# Allegro board RPI_NRF24L01MODULE_FT232.brd
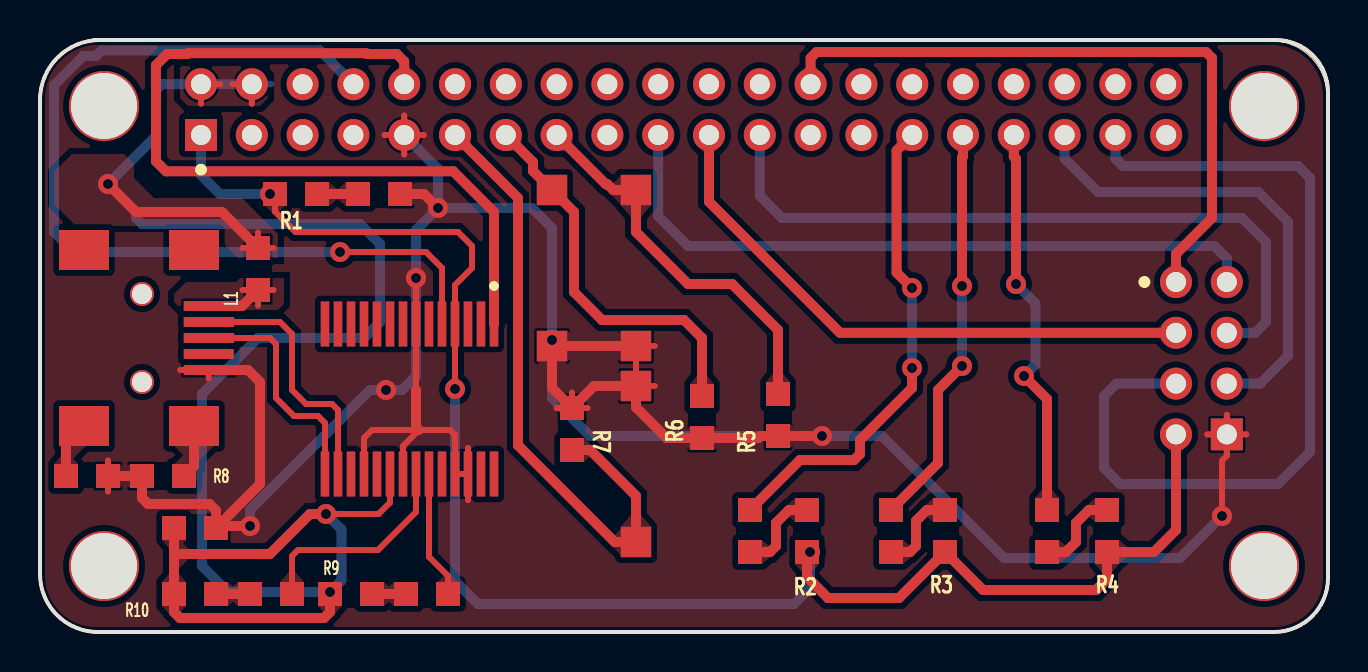
[diagram p0: board, top side]
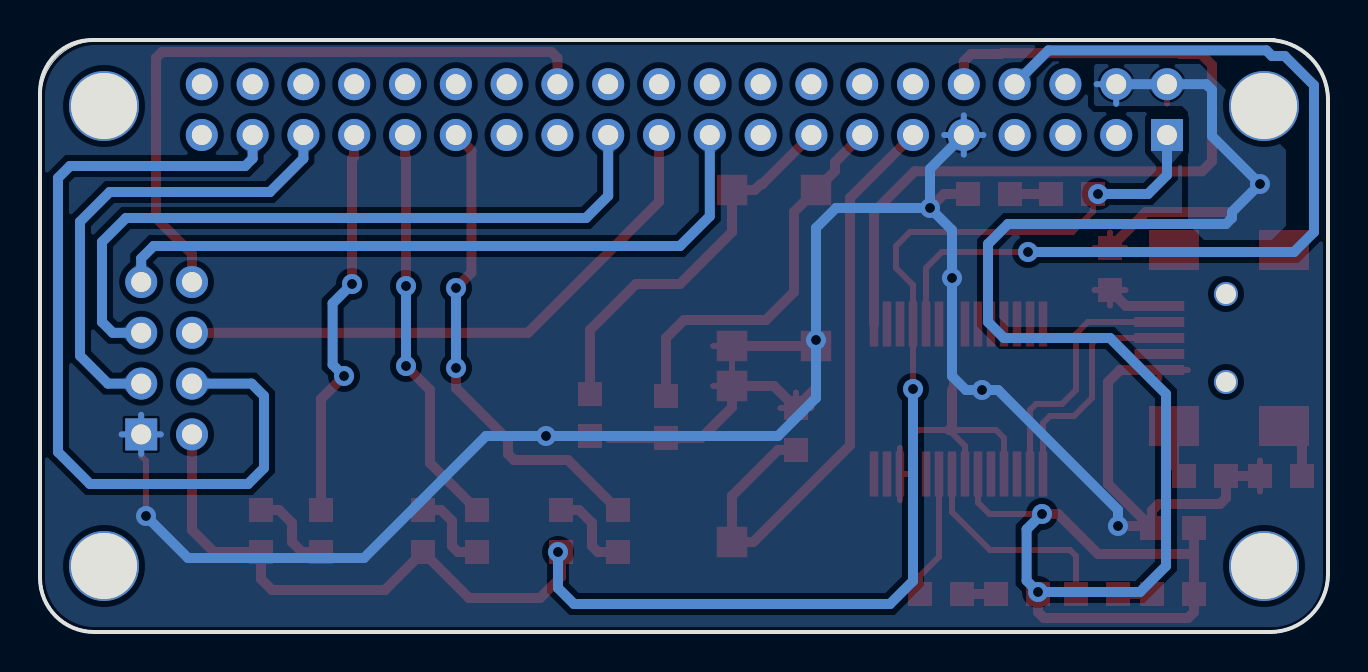
[diagram p1: board, bottom side, seen from below]

Outline 64.4 x 29.6 mm; copper layers: TOP, BOTTOM. Coordinates in mm from the lower left corner of the outline.
Outline path: 3,29.6 arc(0.88,28.72) 0,26.6 0,2.9 arc(0.85,0.85) 2.9,0 61.7,0 arc(63.61,0.79) 64.4,2.7 64.4,27 arc(63.64,28.84) 61.8,29.6 2.7,29.6 ; 0.05,26.81 arc(0.84,28.65) 2.64,29.55 61.76,29.55 arc(63.6,28.69) 64.35,26.8 64.35,2.65 arc(63.57,0.83) 61.75,0.05 2.64,0.05 arc(0.81,0.91) 0.05,2.8 0.05,26.81

## Design rules (mm)
constraint set DEFAULT: min track width 0.3

## Placement (name value [footprint] x y rotation side)
C1  10uF  [CAP_SMD_0805]  6.7 5.2 0 top
C2  4.7nF  [CAP_SMD_0805]  1.3 7.8 0 top
D1  LED  [LED_SMD_0805]  18 21.9 180 top
D2  LED  [LED_SMD_0805]  35.5 6.1 270 top
D3  LED  [LED_SMD_0805]  42.55 6.1 270 top
D4  LED  [LED_SMD_0805]  50.35 6.1 270 top
D5  LED  [LED_SMD_0805]  18.3 1.9 0 top
D6  LED  [LED_SMD_0805]  10.5 1.9 0 top
J1  RPI_HEADER  [J2_40_254]  8.05 24.85 0 top
L1  INDUCTOR  [RES_SMD_0805]  10.9 17.1 90 top
NOREF  -  [unnamed]  3.2 26.3 0 top
NOREF#2  -  [unnamed]  61.2 3.3 0 top
NOREF#3  -  [unnamed]  3.2 3.3 0 top
NOREF#4  -  [unnamed]  61.2 26.3 0 top
R1  330R  [RES_SMD_0805]  13.85 21.9 180 top
R2  330R  [RES_SMD_0805]  38.35 6.1 270 top
R3  330R  [RES_SMD_0805]  45.25 6.1 270 top
R4  330R  [RES_SMD_0805]  53.35 6.1 270 top
R5  10K  [RES_SMD_0805]  36.9 11.9 270 top
R6  10K  [RES_SMD_0805]  33.1 11.8 270 top
R7  10K  [RES_SMD_0805]  26.6 9.1 90 top
R8  1M  [RES_SMD_0805]  7.2 7.8 180 top
R9  330R  [RES_SMD_0805]  14.5 1.9 0 top
R10  330R  [RES_SMD_0805]  6.7 1.9 0 top
SW1  RESET BUTTON  [SMD_2PIN_BUTTON]  29.8 18.2 90 top
SW2  RESET BUTTON  [SMD_2PIN_BUTTON]  25.6 18.2 90 top
SW3  RESET BUTTON  [SMD_2PIN_BUTTON]  29.8 8.4 270 top
U1  nRF24L01_Module  [NRF24L01_MODULE]  56.8 17.5 270 top
U2  MiniUSB  [MINI_USB]  5.1 14.7 270 top
U3  FT232RL  [SSOP_28]  22.7 14.9 270 top

## Library data of the parts
C1 C2 = CAPACITOR NON-POL
D1-D6 = LED
J1 = RPI_HEADER
L1 = INDUCTOR
R1-R10 = R
SW1-SW3 = SW_PB_SPST
U1 = nRF24L01_Module
U2 = Mini USB
U3 = FT232RL_2

## Footprints (pads in the part's own frame, mm; a bottom-side part is the same pattern mirrored in y, then rotated)
CAP_SMD_0805
  rect 1.2x1.2 smd: 1(0,0) 2(2.1,0)
J2_40_254
  rect 1.6x1.6 hole 1: 1(0,0)
  round 1.6 hole 1: 2(0,2.54) 3(2.54,0) 4(2.54,2.54) 5(5.08,0) 6(5.08,2.54) 7(7.62,0) 8(7.62,2.54) 9(10.16,0) 10(10.16,2.54) 11(12.7,0) 12(12.7,2.54) 13(15.24,0) 14(15.24,2.54) 15(17.78,0) 16(17.78,2.54) 17(20.32,0) 18(20.32,2.54) 19(22.86,0) 20(22.86,2.54) 21(25.4,0) 22(25.4,2.54) 23(27.94,0) 24(27.94,2.54) 25(30.48,0) 26(30.48,2.54) 27(33.02,0) 28(33.02,2.54) 29(35.56,0) 30(35.56,2.54) 31(38.1,0) 32(38.1,2.54) 33(40.64,0) 34(40.64,2.54) 35(43.18,0) 36(43.18,2.54) 37(45.72,0) 38(45.72,2.54) 39(48.26,0) 40(48.26,2.54)
LED_SMD_0805
  rect 1.2x1.2 smd: 1(0,0) 2(2.1,0)
MINI_USB
  rect 0.5x2.5 smd: 1(-1.6,3.336) 2(-0.8,3.336) 3(0,3.336) 4(0.8,3.336) 5(1.6,3.336)
  rect 2x2.5 smd: 6(4.4,2.6) 7(-4.4,2.6) 8(-4.4,-2.9) 9(4.4,-2.9)
  round 1.2 hole 1: 10(2.2,0) 11(-2.2,0)
NRF24L01_MODULE
  rect 1.6x1.6 hole 1: 1(7.62,2.54)
  round 1.6 hole 1: 2(7.62,0) 3(5.08,2.54) 4(5.08,0) 5(2.54,2.54) 6(2.54,0) 7(0,2.54) 8(0,0)
RES_SMD_0805
  rect 1.2x1.2 smd: 1(0,0) 2(2.1,0)
SMD_2PIN_BUTTON
  rect 1.524x1.524 smd: 1(-3.9,0) 2(3.9,0)
SSOP_28
  rect 2.25x0.43 smd: 1(-0.5,0) 2(-0.5,-0.65) 3(-0.5,-1.3) 4(-0.5,-1.95) 5(-0.5,-2.6) 6(-0.5,-3.25) 7(-0.5,-3.9) 8(-0.5,-4.55) 9(-0.5,-5.2) 10(-0.5,-5.85) 11(-0.5,-6.5) 12(-0.5,-7.15) 13(-0.5,-7.8) 14(-0.5,-8.45) 15(7,-8.45) 16(7,-7.8) 17(7,-7.15) 18(7,-6.5) 19(7,-5.85) 20(7,-5.2) 21(7,-4.55) 22(7,-3.9) 23(7,-3.25) 24(7,-2.6) 25(7,-1.95) 26(7,-1.3) 27(7,-0.65) 28(7,0)
unnamed
  round 3.5 hole 3.3: (0,0)

## Nets
3V3: J1.1 R1.2 R2.2 R3.2 R4.2 U1.2(VCC) U3.4(VCCIO)
5V: C1.1 J1.2 J1.4 L1.2 R9.1 R10.1 U3.20
GND: C1.2 C2.2 D1.1(CATHODE) J1.9 R5.2 R6.2 R7.2 R8.2 SW1.1 SW2.1 SW3.1 U1.1 U2.5 U3.7 U3.18 U3.21 U3.25 U3.26
BUTTON1: J1.15 R5.1 SW1.2
BUTTON2: J1.13 R6.1 SW2.2
BUTTON3: J1.11 R7.1 SW3.2
DM: U2.2 U3.16
DP: U2.3 U3.15
NRF_CE: J1.35 U1.3
NRF_CS: J1.37 U1.4
NRF_IRQ: J1.26 U1.8
NRF_MISO: J1.19 U1.7
NRF_MOSI: J1.21(IO9/SPI_MISO) U1.6
NRF_SCK: J1.23 U1.5
RPI_RX: J1.10 U3.1
RPI_TX: J1.8 U3.5
N04722: D1.2 R1.1
N83618: D2.2 R2.1
N83654: D2.1(CATHODE) J1.29
N83700: D3.2 R3.1
N83742: D4.2 R4.1
N83746: D3.1(CATHODE) J1.31
N83750: D4.1(CATHODE) J1.33
N85841: D5.2 U3.23
N85845: D6.2 U3.22
N87051: L1.1 U2.1
N87135: C2.1 U2.9(SHIELD4)
N87147: R8.1 U2.6
N856191: D5.1(CATHODE) R9.2
N856351: D6.1(CATHODE) R10.2

Pads without a net: J1 3 5 6 7 12 14 16 17 18 20 22 24 25 27 28 30 32 34 36 38 39 40; U2 4 7 8 10 11; U3 2 3 6 8 9 10 11 12 13 14 17 19 24 27 28

## Via types
v1: diameter 1, hole 0.5, TOP to BOTTOM, 20 vias

## Routing (per net, layer and track width the routed paths; a pad name or vN(x,y) marks a point on that pad's centre or on a via; arc(x,y) is an arc through that point)
3V3: length 83.7
  TOP w0.3: v1(20.75,12.15) U3.4 20.75,17.35 21.6,18.2 21.6,19.3 20.9,20 12.77,20 11.75,21.02 R1.2
  TOP w0.5: R2.2 38.35,2.75 39.4,1.7 42.95,1.7 R3.2 47.15,2.1 52.8,2.1 53.35,2.65 R4.2 55.7,4 56.8,5.1 U1.2 ; R1.2 v1(11.5,21.9)
  BOTTOM w0.5: v1(11.5,21.9) 9,21.9 8.05,22.85 J1.1 ; v1(38.5,4) 38.5,2.2 37.7,1.4 21.9,1.4 20.75,2.55 v1(20.75,12.15)
5V: length 103.5
  TOP w0.3: v1(14.5,2) R9.1 ; 9.03,27.39 J1.2 8.05,26.41 ; 9.61,27.39 J1.4 10.59,26.41 ; L1.2 11.68,19.2 ; L1.2 10.12,19.2 ; L1.2 10.9,19.98 ; v1(14.3,5.9) 16.93,5.9 17.5,6.47 U3.20
  TOP w0.5: v1(3.4,22.4) 4.8,21 9.1,21 L1.2 ; 6.7,3.9 R10.1 6.7,1 7,0.7 14.2,0.7 14.5,1 R9.1 ; 6.7,3.9 C1.1 ; 6.7,3.9 11.5,3.9 13.5,5.9 v1(14.3,5.9)
  BOTTOM w0.3: 11.57,27.39 J1.4 10.59,26.41
  BOTTOM w0.5: v1(14.3,5.9) 15.07,5.13 15.07,2.57 v1(14.5,2) 9.4,2 8.1,3.3 8.1,11.9 10.9,14.7 16.2,14.7 17,15.5 17,19.4 16,20.4 5.1,20.4 4.8,20.7 4.8,21 v1(3.4,22.4) 5.8,24.8 5.8,27.1 6.09,27.39 J1.2 J1.4
GND: length 172.9
  TOP w0.3: 18.21,23.87 J1.9 ; J1.9 18.21,25.83 ; J1.9 19.19,24.85 ; J1.9 17.23,24.85 ; U1.1 60.32,9.88 ; U1.1 59.34,8.8 59.1,8.56 v1(59.1,5.8) ; U1.1 59.34,10.86 ; U1.1 58.36,9.88 ; U3.18 16.2,9.7 16.6,10.1 18.95,10.1 ; 8.44,12.67 U2.5 7.01,13.1 ; 18.95,10.1 18.15,9.3 U3.21 ; 18.95,10.1 20.5,10.1 20.75,9.85 U3.25 U3.26 ; 30.74,14.3 SW1.1 29.8,13.36 ; R7.2 27.38,11.2 ; R7.2 26.6,11.98 ; R7.2 25.82,11.2 ; v1(18.8,17.7) U3.7 18.8,12.1 ; 3.4,8.58 C2.2 3.4,7.02 ; U3.26 21.4,9.2 ; U3.26 21.4,6.6 ; 29.8,13.24 SW3.1 30.74,12.3 ; SW2.1 v1(25.6,14.6) ; C1.2 8.9,5.3
  TOP w0.5: v1(19.9,21.2) 19.2,21.9 D1.1 ; C1.2 8.8,6.08 8.48,6.4 5.4,6.4 5.1,6.7 R8.2 C2.2 ; 18.95,10.1 18.8,10.25 18.8,12.1 ; v1(39.1,9.8) R5.2 36.02,9.8 35.92,9.7 R6.2 31.33,9.7 29.8,11.23 SW3.1 27.7,12.3 R7.2 25.6,12.2 SW2.1 SW1.1 ; v1(10.5,5.3) 8.9,5.3 11,7.4 11,12.5 10.4,13.1 U2.5
  BOTTOM w0.3: 58.36,9.88 U1.1 ; U1.1 59.34,10.86 ; U1.1 59.34,8.9 ; U1.1 60.32,9.88 ; J1.9 18.21,25.83 ; J1.9 17.23,24.85 ; J1.9 19.19,24.85 ; J1.9 18.21,23.87
  BOTTOM w0.5: v1(19.9,21.2) 19.9,23.16 J1.9 ; v1(19.9,21.2) 24.6,21.2 25.6,20.2 v1(25.6,14.6) 25.6,11.7 27.5,9.8 v1(39.1,9.8) 42.1,9.8 48.2,3.7 57,3.7 v1(59.1,5.8) ; v1(19.9,21.2) 18.8,20.1 v1(18.8,17.7) 18.8,12.8 18.1,12.1 v1(17.3,12.1) 16.5,12.1 10.5,6.1 v1(10.5,5.3)
BUTTON1: length 19.5
  TOP w0.5: J1.15 28.3,22.38 28.38,22.38 28.66,22.1 SW1.2 29.8,20 32.4,17.4 34.6,17.4 36.9,15.1 R5.1
BUTTON2: length 19.5
  TOP w0.5: R6.1 33.1,14.7 32.2,15.6 28.1,15.6 26.7,17 26.7,21 SW2.2 24.65,23.05 24.65,23.49 J1.13
BUTTON3: length 31.2
  TOP w0.5: R7.1 27.5,9.1 29.8,6.8 SW3.2 28.73,4.5 23.9,9.33 23.9,21.7 J1.11
DM: length 13.1
  TOP w0.3: U3.16 14.9,11.1 14.6,11.4 13.3,11.4 12.6,12.1 12.6,14.9 12,15.5 U2.2
DP: length 11.7
  TOP w0.3: U2.3 11.5,14.7 11.8,14.4 11.8,11.7 12.7,10.8 13.9,10.8 14.25,10.45 U3.15
NRF_CE: length 24
  BOTTOM w0.5: U1.3 61,12.42 62.4,13.82 62.4,20.51 60.91,22 52.9,22 51.23,23.67 J1.35
NRF_CS: length 43.8
  BOTTOM w0.5: U1.4 53.82,12.42 53.2,11.8 53.2,8.2 54,7.4 61.9,7.4 63.5,9 63.5,22.7 62.9,23.3 54.14,23.3 53.77,23.67 J1.37
NRF_IRQ: length 33.6
  TOP w0.5: J1.26 38.53,28.7 38.83,29 58.3,29 58.6,28.7 58.6,20.7 56.8,18.9 U1.8
NRF_MISO: length 34.5
  BOTTOM w0.5: J1.19 30.91,20.79 32.4,19.3 58.72,19.3 59.34,18.68 U1.7
NRF_MOSI: length 29.4
  TOP w0.5: U1.6 40,14.96 33.45,21.51 J1.21
NRF_SCK: length 35.5
  BOTTOM w0.5: U1.5 60.76,14.96 61.3,15.5 61.3,19.5 60.1,20.7 37.1,20.7 35.99,21.81 J1.23
RPI_RX: length 42.3
  TOP w0.5: J1.10 18.21,28.53 17.84,28.9 16.35,28.9 16.31,28.94 7.41,28.94 7.37,28.9 6.36,28.9 5.8,28.34 5.8,23.54 6.3,23.04 20.67,23.04 22.7,21 U3.1
RPI_TX: length 46.7
  TOP w0.3: U3.5 20.1,18.2 19.3,19 v1(15,19)
  BOTTOM w0.5: J1.8 13.98,29.08 3.08,29.08 2.8,28.8 2.16,28.8 0.7,27.34 0.7,20 1.7,19 v1(15,19)
N04722: length 2.1
  TOP w0.5: R1.1 D1.2
N83618: length 4.4
  TOP w0.5: D2.2 36.5,4 36.8,4.3 36.8,5.45 37.45,6.1 R2.1
N83654: length 24.3
  TOP w0.5: J1.29 42.83,24.07 42.83,17.97 v1(43.6,17.2) ; D2.1 38,8.6 40.7,8.6 41,8.9 41,9.6 43.6,12.2 v1(43.6,13.2)
  BOTTOM w0.5: v1(43.6,13.2) v1(43.6,17.2)
N83700: length 4.3
  TOP w0.5: D3.2 43.5,4 43.8,4.3 43.8,5.55 44.35,6.1 R3.1
N83742: length 4.4
  TOP w0.5: R4.1 52.45,6.1 51.8,5.45 51.8,4.5 51.3,4 D4.2
N83746: length 20.2
  TOP w0.5: J1.31 46.15,23.77 46.1,23.72 v1(46.1,17.3) ; v1(46.1,13.3) 44.9,12.1 44.9,8.45 D3.1
  BOTTOM w0.5: v1(46.1,13.3) v1(46.1,17.3)
N83750: length 19.9
  TOP w0.5: D4.1 50.35,11.65 v1(49.2,12.8) ; J1.33 48.69,23.77 48.8,23.66 v1(48.8,17.4)
  BOTTOM w0.5: v1(48.8,17.4) 49.77,16.43 49.77,13.37 v1(49.2,12.8)
N85841: length 6.4
  TOP w0.3: U3.23 19.45,3.75 20.4,2.8 D5.2
N85845: length 10.9
  TOP w0.3: U3.22 18.8,6 16.9,4.1 12.9,4.1 12.6,3.8 D6.2
N87051: length 5.1
  TOP w0.3: L1.1 11.68,17.1 ; L1.1 10.9,16.32 ; L1.1 10.12,17.1
  TOP w0.5: L1.1 10.1,16.3 U2.1
N87135: length 2.9
  TOP w0.5: U2.9 1.3,9.4 C2.1
N87147: length 2.7
  TOP w0.5: U2.6 7.7,8.3 R8.1
N856191: length 1.7
  TOP w0.5: R9.2 D5.1
N856351: length 1.7
  TOP w0.5: R10.2 D6.1

## Copper pours and planes (outline as drawn; the poured copper is in the pictures)
5V on TOP: 9.9,18.7 11.9,18.7 11.9,19.9 10.1,21.7 5.7,21.7 4.7,22.7 4.7,23.4 4.2,23.9 1.6,23.9 0.7,23 0.7,21.4 1.8,20.3 8.3,20.3
5V on TOP: 11.2,28 11.2,28.1 11,28.3 7.1,28.3 7,28.2 7,26.7 7.4,26.3 11,26.3 11.4,26.7 11.4,27.8
5V on BOTTOM: 11.6,28.4 6.4,28.4 2.1,24.1 2.1,20.3 2.8,19.6 6.2,19.6 7,20.4 7,26 7.3,26.3 11.6,26.3 11.7,26.4 11.7,28.3
GND on TOP: 2.65,0.25 0.95,1.05 0.25,2.8 0.25,26.8 0.99,28.51 2.65,29.35 61.75,29.35 63.45,28.55 64.15,26.8 64.15,2.65 63.43,0.97 61.75,0.25 ; 8 cut-outs
GND on BOTTOM: 2.65,0.25 0.95,1.05 0.25,2.8 0.25,26.8 0.99,28.51 2.65,29.35 61.75,29.35 63.45,28.55 64.15,26.8 64.15,2.65 63.43,0.97 61.75,0.25 ; 3 cut-outs
N87051 on TOP: 11.9,16.1 7.1,16.1 6.7,16.5 6.7,16.9 7.3,17.5 9.8,17.5 10,17.7 12.2,17.7 12.2,16.4

Small or netless copper shapes (teardrops, artwork), in the pictures only: 75 on TOP, 42 on BOTTOM
